# Altium PCB GPS_Adapter.PcbDoc
Units mm, origin at the board's own origin, x right, y up, seen from the top; angles counter-clockwise.
Board outline 36.32 x 36.7 mm, 2 copper layers (Top Layer, Bottom Layer); 10 components, 5 nets, 28 pads, 0 vias.
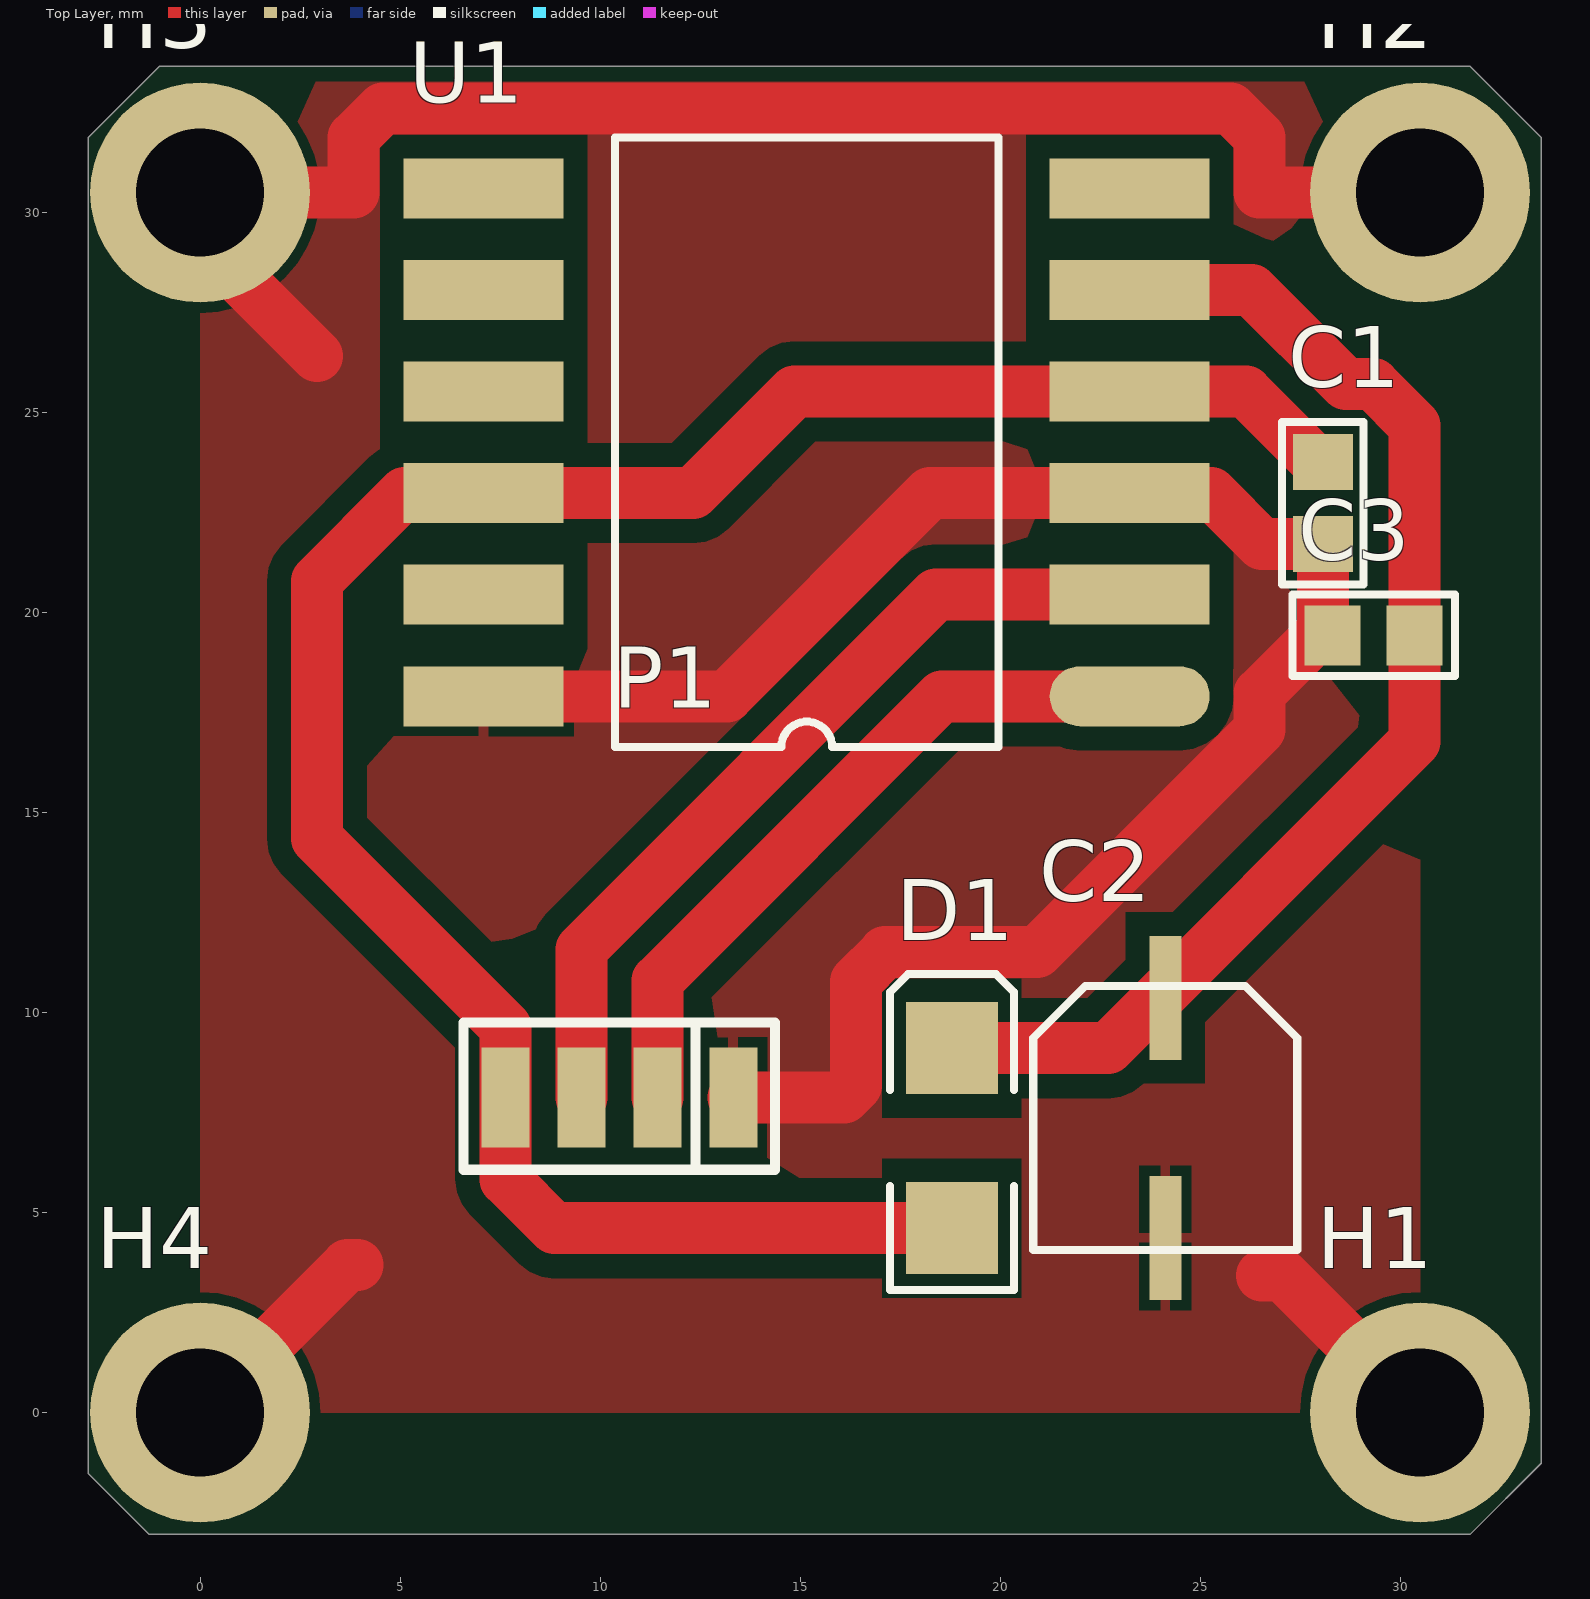
[diagram p0: Top Layer view]
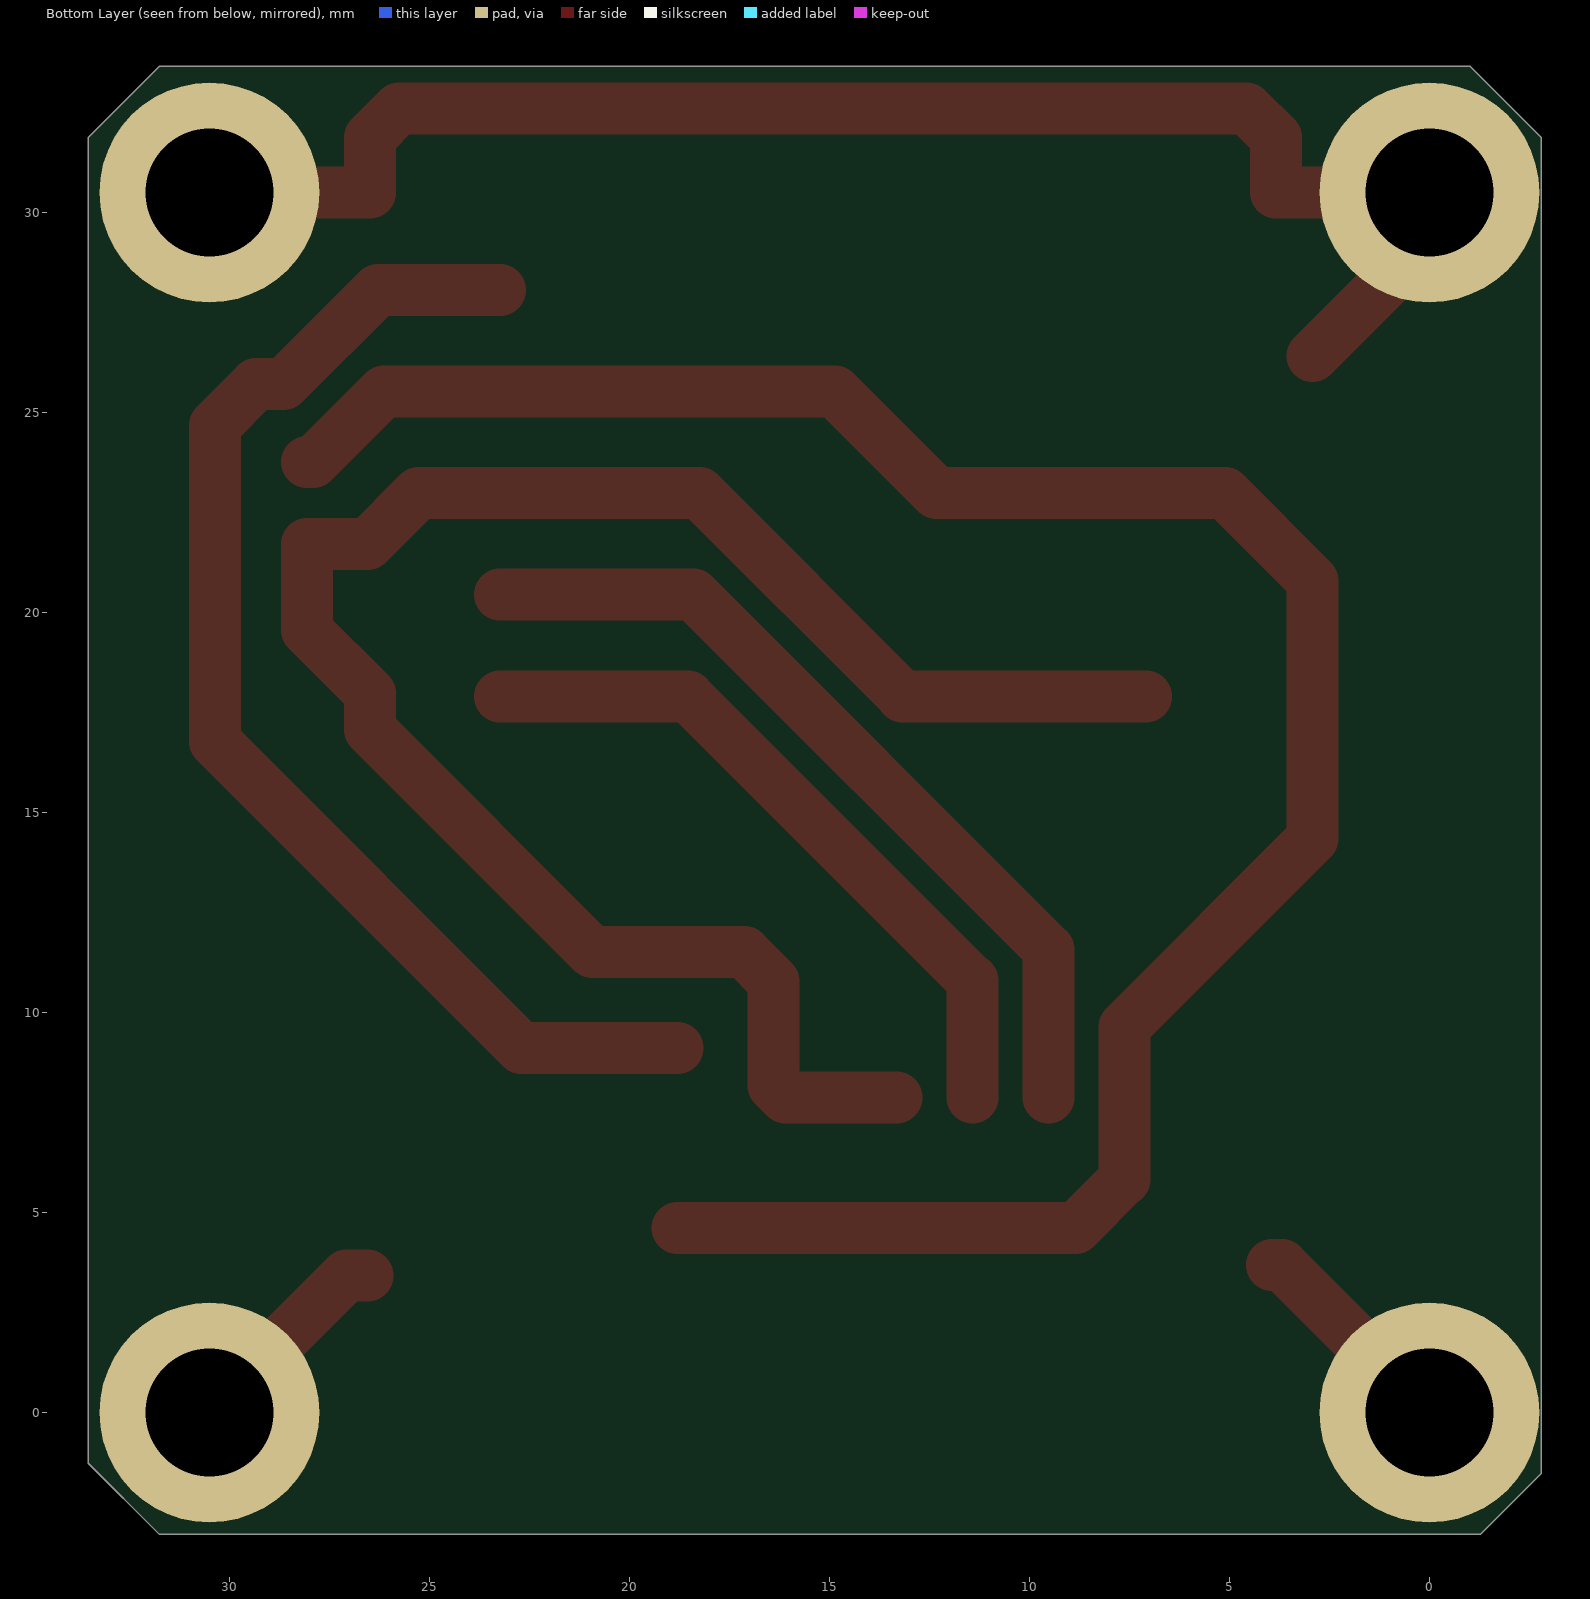
[diagram p1: Bottom Layer view, seen from below]

## Layer stack, top to bottom
Top Solder: solder mask 0.0102, Solder Resist, Dk 3.5
Top Layer: signal copper 0.0356
Dielectric 1: dielectric 0.32, FR-4, Dk 4.8
Bottom Layer: signal copper 0.0356
Bottom Solder: solder mask 0.0102, Solder Resist, Dk 3.5

## Board outline
-2.794,-1.524 -1.27,-3.048 31.75,-3.048 33.528,-1.27 33.528,31.877 31.75,33.655 -1.016,33.655 -2.794,31.877

## Design rules (kind name [scope] priority, off if disabled: settings)
Clearance [All] p1: gap=0.6
PolygonConnect [All] p1: connectstyle=Relief reliefconductorwidth=0.254 reliefentries=4 polygonreliefangle="90 Angle" airgapwidth=0.254
RoutingVias [All] p1: holewidth=0.711 width=1.27 viastyle="Through Hole" minholewidth=0.711 minwidth=1.27 maxholewidth=0.711 maxwidth=1.27
SolderMaskExpansion [All] p1: expansion=0.102
Width [All] p1: maxlimit=1000 minlimit=0.254 preferedwidth=1.3
30 further rules are at their usual default settings.

## Components (designator, comment, footprint, x,y, rotation, side; value= is the part's Value field where it differs from the comment)
C1 "100nF" R0805 28.067,22.733 r90 top
C2 "220uF" "SMD CAPACITOR 220UF 16V" 24.13,7.366 r0 top
C3 "100nF" R0805 29.337,19.431 r0 top
D1 "Diode" Diode 18.796,6.858 r270 top
H1 "Mounting Hole" "M3 BOLT HOLE"#1 20.955,0 r0 top locked
H2 "Mounting Hole" "M3 BOLT HOLE"#2 26.543,40.132 r0 top locked
H3 "Mounting Hole" "M3 BOLT HOLE"#3 -3.429,32.639 r0 top locked
H4 "Mounting Hole" "M3 BOLT HOLE"#4 -2.921,-0.254 r0 top locked
P1 "Header 4" "SMD 4Wire" 11.43,7.874 r90 top
U1 "Quecel L80" "Quectel L80 GPS" 23.241,17.907 r180 top

## Footprints (in the part's own frame and the unit in brackets; to place one, negate y for a bottom-side part, rotate by r counter-clockwise, add the part's x,y. Pads: shape width x height; smd on the part's side, far side on the other; paste and mask are expansions set on the pad)
Diode [mm] "DO-214-AA/SMB; 2 C-Bend Leads; Body 5.3 x 3.6 mm, inc. leads (LxW)"
  rect 2.3x2.3 smd: 1(2.25,0) 2(-2.25,0)
  silkscreen extent -4.1,-1.55 3.8,1.55, body extent -2.54,-1.02 2.54,1.02, height 2
"M3 BOLT HOLE"#1 [mm]
  round 5.5 hole 3.2: 1(9.545,0)
"M3 BOLT HOLE"#2 [mm]
  round 5.5 hole 3.2: 1(3.957,-9.632)
"M3 BOLT HOLE"#3 [mm]
  round 5.5 hole 3.2: 1(3.429,-2.139)
"M3 BOLT HOLE"#4 [mm]
  round 5.5 hole 3.2: 1(2.921,0.254)
"Quectel L80 GPS" [mm]
  oval 4x1.5 smd: 1(0,0)
  rect 4x1.5 smd: 2(0,-2.54) 3(0,-5.08) 4(0,-7.62) 5(0,-10.16) 6(0,-12.7) 7(16.15,-12.7) 8(16.15,-10.16) 9(16.15,-7.62) 10(16.15,-5.08) 11(16.15,-2.54) 12(16.15,0)
  silkscreen extent 3.28,-13.97 12.87,1.27, body extent 0.07,-13.84 16.07,2.16, height 6.95
R0805 [mm]
  rect 1.4x1.5 smd: 1(-1.025,0) 2(1.025,0)
  silkscreen extent -2.03,-1.02 2.03,1.02, body extent -1.4,-0.76 1.4,0.76, height 1
"SMD 4Wire" [mm]
  rect 2.5x1.2 smd: 1(0,-1.9) 2(0,0) 3(0,1.9) 4(0,3.8)
  silkscreen extent -1.81,-2.94 1.88,4.84
"SMD CAPACITOR 220UF 16V" [mm]
  rect 0.8x3.1 smd: 1(0,3) 2(0,-3)
  silkscreen extent -3.3,-3.3 3.3,3.3, body extent -3,-3 3,3, height 5

## Part data
C1 C3: library part Cap, "Capacitor"
C2: library part Cap2, "Capacitor"
D1: "Default Diode"
H1 H2 H3 H4: library part TestPin
P1: "Header, 4-Pin"

## Nets (pads, with @x,y where several pads share a name; then routed paths per layer and width w, separated by ;. In a path a pad name is that pad's centre, name@x,y a point inside that pad or via, vN(x,y) a via of type N, cw(c..) or ccw(c..) an arc to the next point about the centre after c; other vN are vias at no path point)
3V3: C1.2 D1.1 P1.4 U1.4 U1.10 | length 56.4
  Top Layer w1.3: D1.1 8.854,4.608 7.63,5.832 P1.4 7.63,9.642 2.921,14.351 2.921,20.795 5.113,22.987 U1.10 12.319,22.987 14.859,25.527 U1.4 26.142,25.527 27.911,23.758 C1.2
GND: C1.1 C2.2 C3.1 H1.1 H2.1 H3.1 H4.1 P1.1 U1.3 U1.12 | length 97.4
  Top Layer w1.3: H4.1 3.683,3.683 3.937,3.683 ; 2.921,26.416 0,29.337 H3.1 3.841,30.5 3.841,31.875 4.573,32.607 25.759,32.607 26.491,31.875 26.491,30.5 H2.1 ; U1.12 13.168,17.907 18.248,22.987 U1.3 25.273,22.987 26.552,21.708 C1.1 28.067,19.558 26.491,17.982 26.491,17.079 20.92,11.508 17.128,11.508 16.396,10.776 16.396,8.171 16.099,7.874 P1.1 ; 26.543,3.429 27.071,3.429 H1.1
NetC2_1: C2.1 C3.2 D1.2 U1.5 | length 31.2
  Top Layer w1.3: D1.2 22.697,9.108 30.362,16.773 C3.2 30.362,24.681 29.335,25.708 28.648,25.708 26.289,28.067 U1.5
NetP1_2: P1.2 U1.1 | length 17.7
  Top Layer w1.3: P1.2 11.43,10.795 18.542,17.907 U1.1
NetP1_3: P1.3 U1.2 | length 21.1
  Top Layer w1.3: P1.3 9.53,11.582 18.395,20.447 U1.2
pads on no net: U1.6 U1.7 U1.8 U1.9 U1.11

## Polygon pours and split planes (outlines as drawn)
GND on Top Layer "Top Layer-No Net" (solid, remove dead copper, pour order 0): 0,33.274 30.5,33.274 30.5,0 0,0

## Silkscreen, mask and mechanical layers (free items; w line width, h text height)
Mechanical 3:
  the board outline again, w0.254